# Altium PCB Dynamics v1.0.0.PcbDoc
Units mm, origin at the board's own origin, x right, y up, seen from the top; angles counter-clockwise.
Board outline 54.36 x 81.66 mm, 2 copper layers (Top Layer, Bottom Layer), stack 1.671 mm thick; 60 components, 46 nets, 239 pads, 558 vias.
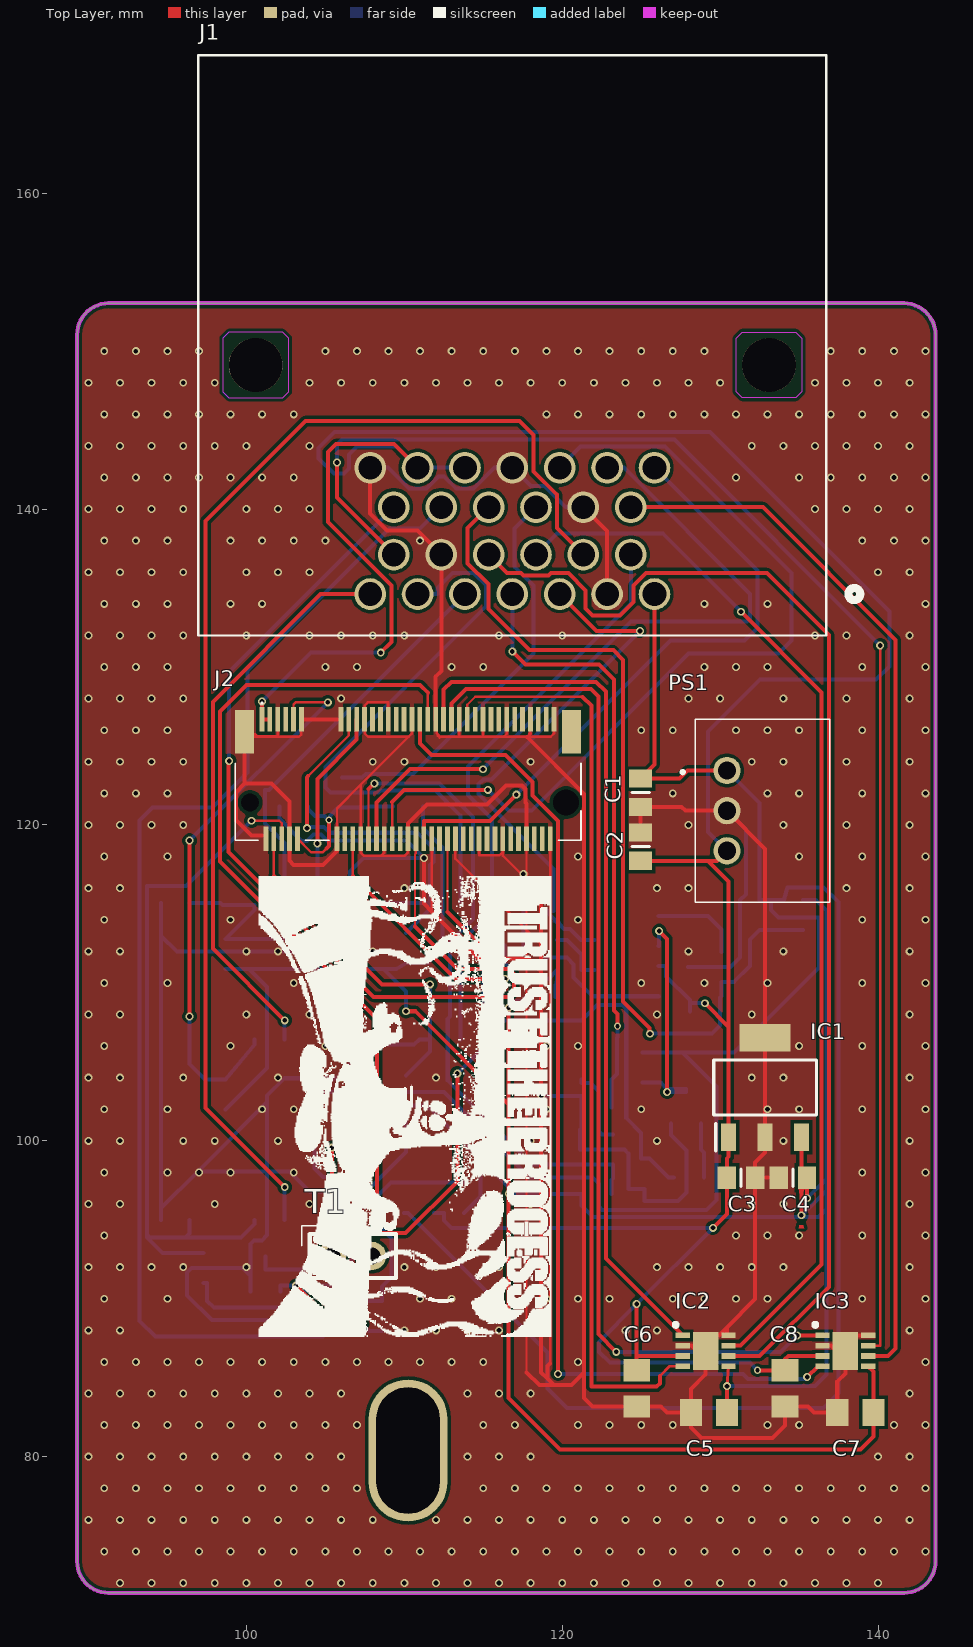
[diagram p0: Top Layer view]
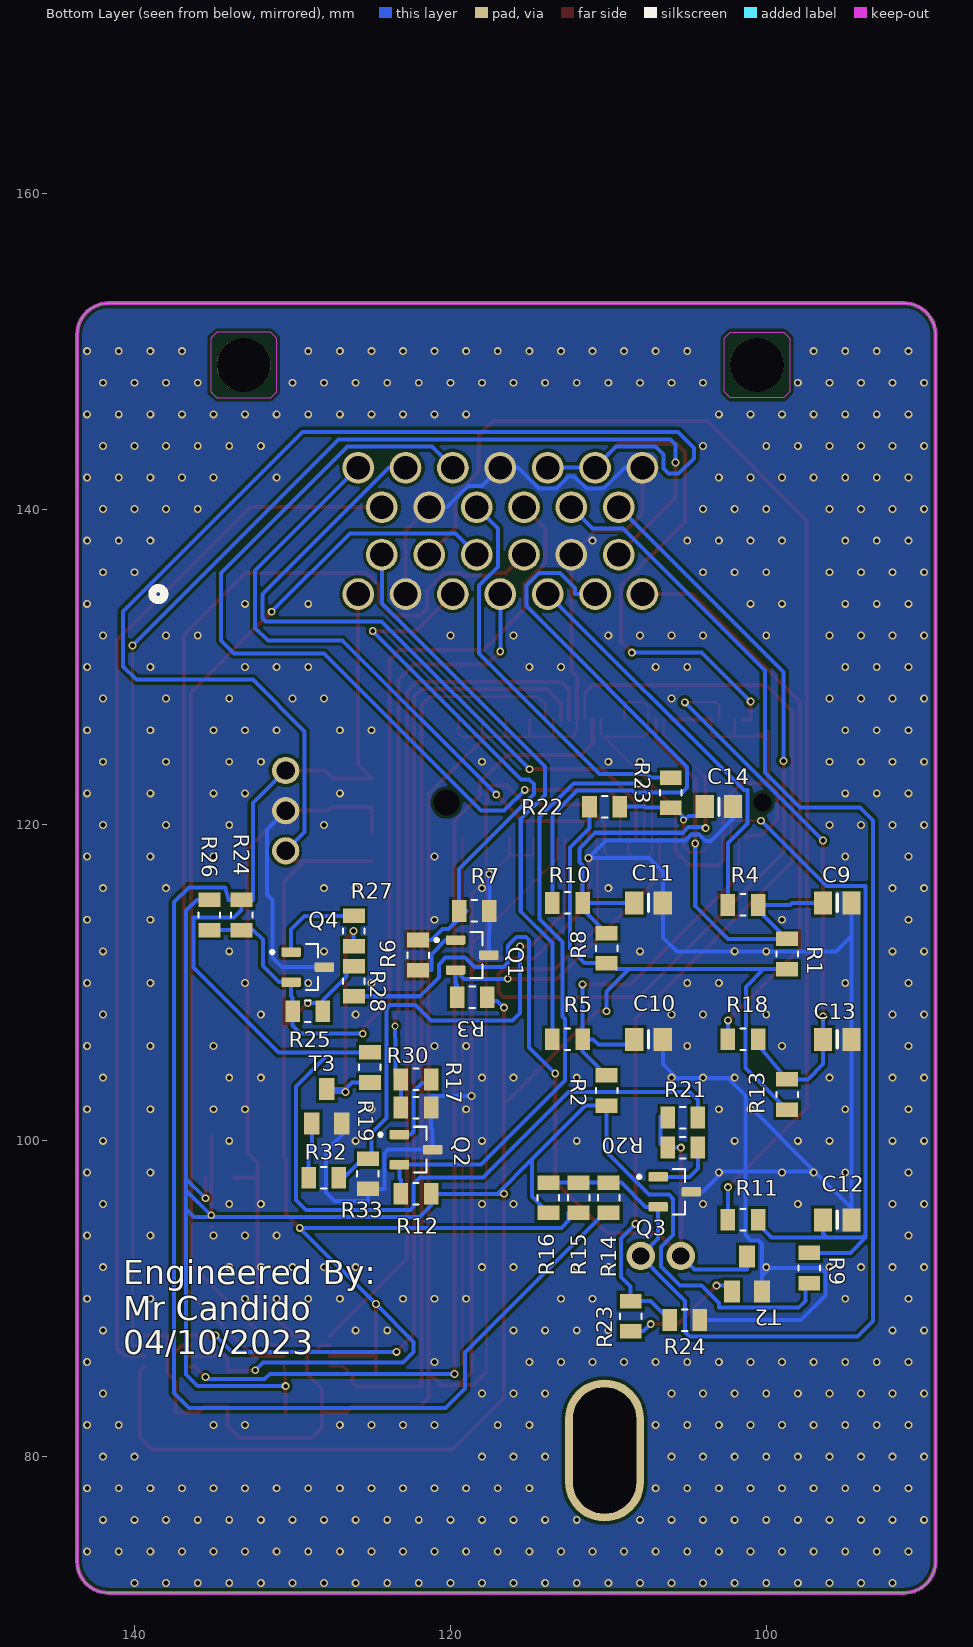
[diagram p1: Bottom Layer view, seen from below]
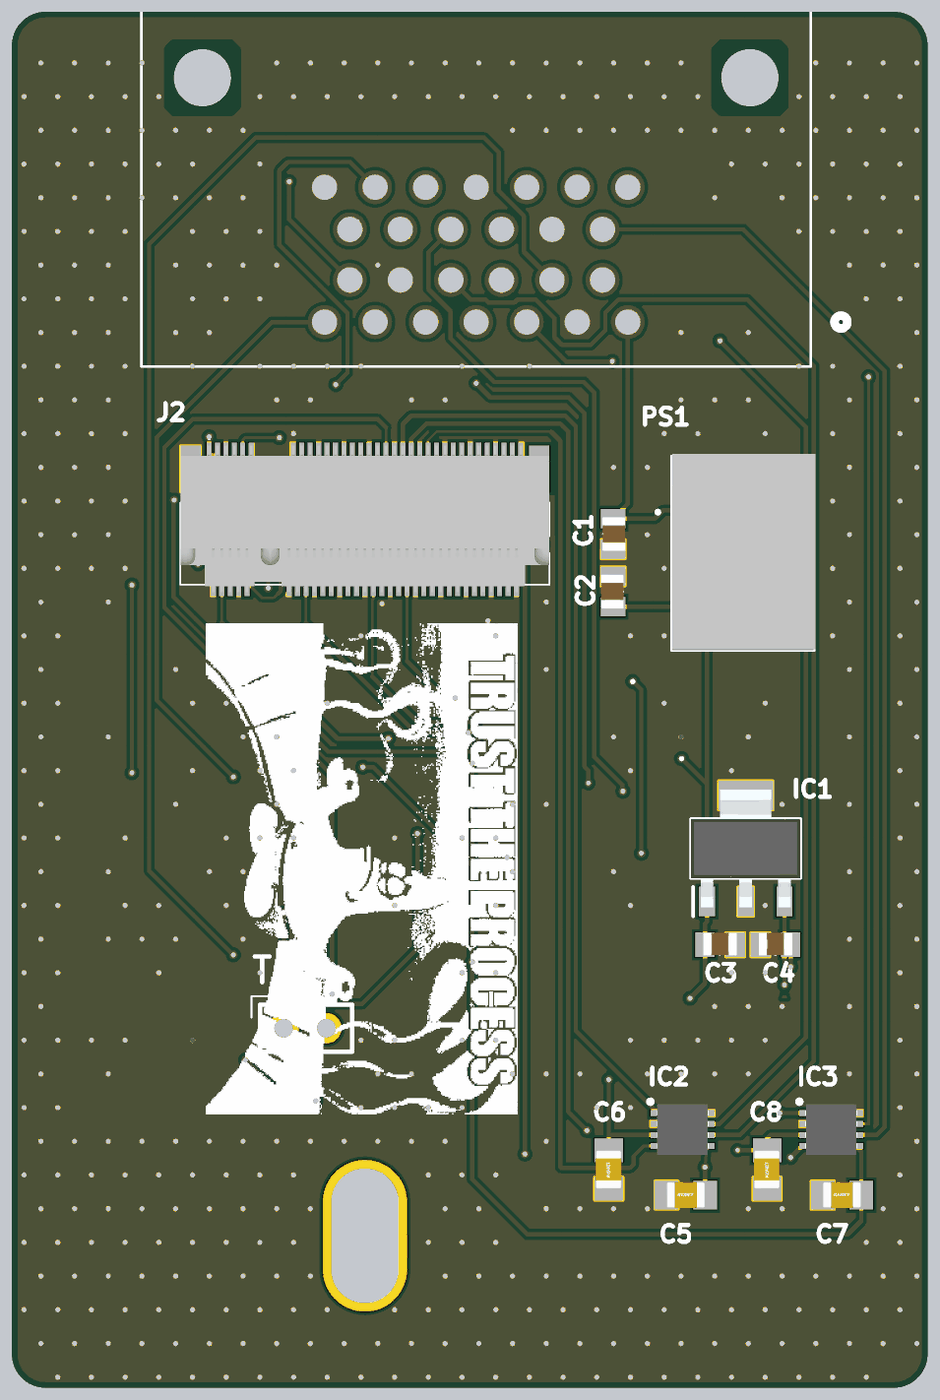
[diagram p2: 3D render of the assembled board from above, using the file's embedded part models]
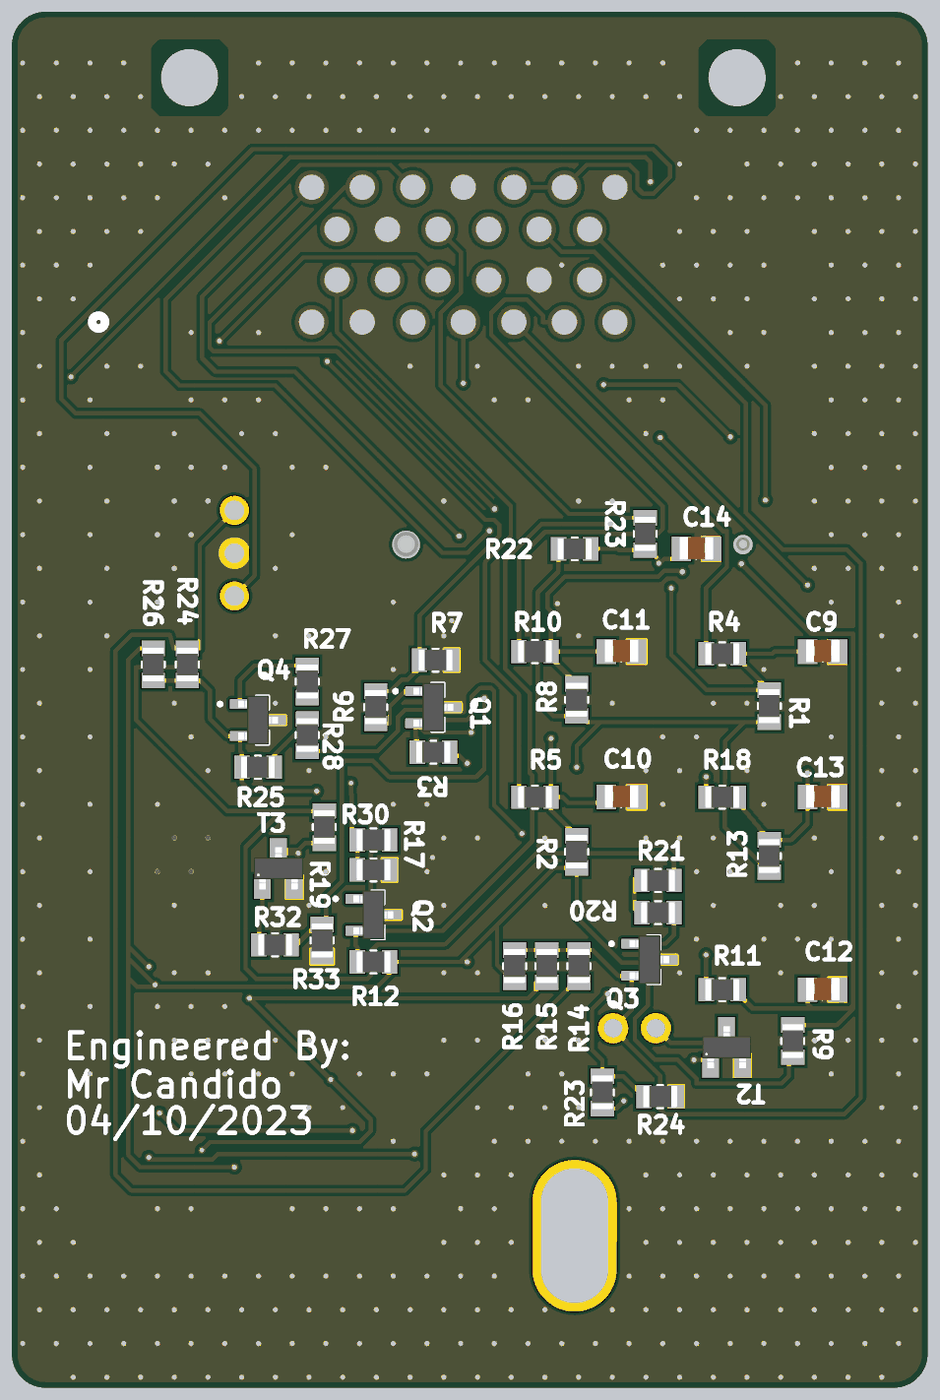
[diagram p3: 3D render of the assembled board from below, using the file's embedded part models]

## Layer stack, top to bottom
Top Solder: solder mask 0.0102, Solder Resist, Dk 3.5
Top Layer: signal copper 0.0356
Dielectric 1: dielectric 1.6, FR-4, Dk 4.8
Bottom Layer: signal copper 0.0356
Bottom Solder: solder mask 0.0102, Solder Resist, Dk 3.5

## Board outline
89.281,73.374 89.281,151.035 cw(c91.281,151.035) 91.281,153.035 141.637,153.035 cw(c141.637,151.035) 143.637,151.035 143.637,73.374 cw(c141.637,73.374) 141.637,71.374 91.281,71.374 cw(c91.281,73.374)

## Design rules (kind name [scope] priority, off if disabled: settings)
BoardOutlineClearance [All] p1: gap=0.2 ignorepadtopadclearanceinfootprint=FALSE
Clearance [All] p1: gap=0.2 ignorepadtopadclearanceinfootprint=TRUE
ComponentClearance [All] p1: gap=0.127 collisioncheckmode=3 verticalgap=0.127 showdistances=TRUE
DiffPairsRouting [All] p1: maxlimit=0.381 minlimit=0.203 mostfreqgap=0.203 toplayer_minwidth=0.203 toplayer_maxwidth=25.4 toplayer_prefwidth=0.203 bottomlayer_minwidth=0.203 bottomlayer_maxwidth=25.4 bottomlayer_prefwidth=0.203 maxuncoupledlength=12.7
Height [All] p1: minheight=0 maxheight=1816.048 prefheight=12.7
HoleSize [All] p1: absolutevalues=TRUE maxlimit=6.3 minlimit=0.3 maxpercent=80.000 minpercent=20.000
HoleToHoleClearance [All] p1: gap=0.25 allowstackedmicrovias=FALSE
MinimumAnnularRing [All] p1: minimumring=0.076
MinimumSolderMaskSliver [All] p1: minsoldermaskwidth=0
PlaneClearance [All] p1: clearance=0.254
PlaneConnect PlaneConnectPowerPads [InPadClass('PowerPads')] p1: planeconnectstyle=Direct reliefexpansion=0.508 reliefentries=4 reliefconductorwidth=0.254 reliefairgap=0.254
PlaneConnect [All] p2: planeconnectstyle=Direct reliefexpansion=0.3 reliefentries=4 reliefconductorwidth=0.203 reliefairgap=0
PolygonConnect PolygonConnectPowerPads [All vs (InPadClass('PowerPads'))] p1: connectstyle=Direct reliefconductorwidth=0.254 reliefentries=4 polygonreliefangle="90 Angle" airgapwidth=0.254
PolygonConnect [All] p2: connectstyle=Direct reliefconductorwidth=0.203 reliefentries=4 polygonreliefangle="90 Angle" airgapwidth=0.203
RoutingVias [All] p1: holewidth=0.3 width=0.5 viastyle="Through Hole" minholewidth=0.3 minwidth=0.5 maxholewidth=0.6 maxwidth=6.6
SMDNeckDown [All] p1: percent=50.000
SilkToSilkClearance [All] p1: silktosilkclearance=0
SilkToSolderMaskClearance [IsPad] p1: minsilkscreentomaskgap=0.127 clearancetoexposedcopper=TRUE
SolderMaskExpansion [All] p1: expansion=0.075 istentingtop=FALSE
UnRoutedNet [All] p1: checkbadconnections=TRUE
Width [All] p1: maxlimit=1 minlimit=0.2 preferedwidth=0.254
19 further rules are at their usual default settings.

## Classes and differential pairs
component class Dynamics_Sch: C1 C2 C3 C4 IC1 J1 J2 PS1
component class Communication: C5 C6 C7 C8 IC2 IC3
component class Analog_Circuit: C9 C10 C11 C12 C13 Q1 Q2 Q3 R1 R2 R3 R4 R5 R6 R7 R8 R9 R10 R11 R12 R13 R14 R15 R16 R17 R18 R19 R20 R21 R23 R24 R28 T1 T2
component class Analog_Circuit_1: C14 Q4 R22 R23 R24 R25 R26 R27 R30 R32 R33 T3

## Components (designator, comment, footprint, x,y, rotation, side; value= is the part's Value field where it differs from the comment)
C1 "0805_Capacitor" 0805_Capacitor 124.968,122.047 r270 top
C2 "0805_Capacitor" 0805_Capacitor 124.968,118.629 r90 top
C3 "0805_Capacitor" 0805_Capacitor 131.318,97.663 r0 top
C4 "0805_Capacitor" 0805_Capacitor 134.609,97.663 r0 top
C5 "0.1u" CAP_0805 129.286,82.804 r0 top
C6 "0.1u" CAP_0805 124.714,84.328 r90 top
C7 "0.1u" CAP_0805 138.557,82.804 r0 top
C8 "0.1u" CAP_0805 134.112,84.328 r90 top
C9 "0805_Capacitor" 0805_Capacitor 95.504,115.062 r180 bottom
C10 "0805_Capacitor" 0805_Capacitor 107.453,106.426 r180 bottom
C11 "0805_Capacitor" 0805_Capacitor 107.453,115.062 r180 bottom
C12 "0805_Capacitor" 0805_Capacitor 95.504,94.996 r180 bottom
C13 "0805_Capacitor" 0805_Capacitor 95.504,106.426 r180 bottom
C14 "0805_Capacitor" 0805_Capacitor 102.997,121.158 r180 bottom
IC1 "MIC5239-3.3YS-TR" SOT230P700X180-4N 132.842,103.378 r90 top
IC2 "MCP2542FD-E_MF" SON65P300X300X100-9N-D 129.085,86.7 r0 top
IC3 "MCP2542FD-E_MF" SON65P300X300X100-9N-D 137.922,86.7 r0 top
J1 "6473423-1" CONN26_6473423-1_TEC 125.84,134.621 r180 top locked
J2 "2199230-3" 21992303 110.236,121.412 r0 top locked
PS1 "R-78E5.0-0.5" R78E5005 130.429,123.444 r270 top
Q1 "LND150K1-G" SOT93-NMOS 118.618,111.76 r180 bottom
Q2 "LND150K1-G" SOT93-NMOS 122.174,99.441 r180 bottom
Q3 "LND150K1-G" SOT93-NMOS 105.791,96.774 r180 bottom
Q4 "LND150K1-G" SOT93-NMOS 129.032,110.998 r180 bottom
R1 "0805_Resistor" 0805_Resistor 98.679,111.826 r270 bottom
R2 "0805_Resistor" 0805_Resistor 110.109,103.185 r270 bottom
R3 "0805_Resistor" 0805_Resistor 118.618,109.093 r0 bottom
R4 "0805_Resistor" 0805_Resistor 101.473,114.935 r180 bottom
R5 "0805_Resistor" 0805_Resistor 112.588,106.426 r180 bottom
R6 "0805_Resistor" 0805_Resistor 122.047,111.76 r90 bottom
R7 "0805_Resistor" 0805_Resistor 118.491,114.554 r180 bottom
R8 "0805_Resistor" 0805_Resistor 110.109,112.202 r270 bottom
R9 "0805_Resistor" 0805_Resistor 97.282,91.948 r270 bottom
R10 "0805_Resistor" 0805_Resistor 112.588,115.062 r180 bottom
R11 "0805_Resistor" 0805_Resistor 101.473,94.996 r180 bottom
R12 "0805_Resistor" 0805_Resistor 122.174,96.647 r0 bottom
R13 "0805_Resistor" 0805_Resistor 98.679,102.931 r270 bottom
R14 "0805_Resistor" 0805_Resistor 109.982,96.393 r90 bottom
R15 "0805_Resistor" 0805_Resistor 111.887,96.393 r90 bottom
R16 "0805_Resistor" 0805_Resistor 113.792,96.393 r90 bottom
R17 "0805_Resistor" 0805_Resistor 122.174,103.886 r0 bottom
R18 "0805_Resistor" 0805_Resistor 101.473,106.426 r180 bottom
R19 "0805_Resistor" 0805_Resistor 122.174,102.108 r180 bottom
R20 "0805_Resistor" 0805_Resistor 105.283,99.568 r0 bottom
R21 "0805_Resistor" 0805_Resistor 105.283,101.473 r180 bottom
R22 "0805_Resistor" 0805_Resistor 110.236,121.158 r0 bottom
R23 "0805_Resistor" 0805_Resistor 108.585,88.9 r90 bottom
R23 "0805_Resistor" 0805_Resistor 106.045,122.047 r270 bottom
R24 "0805_Resistor" 0805_Resistor 105.156,88.646 r0 bottom
R24 "0805_Resistor" 0805_Resistor 133.223,114.3 r270 bottom
R25 "0805_Resistor" 0805_Resistor 129.032,108.204 r0 bottom
R26 "0805_Resistor" 0805_Resistor 135.255,114.3 r270 bottom
R27 "0805_Resistor" 0805_Resistor 126.111,113.284 r270 bottom
R28 "0805_Resistor" 0805_Resistor 126.111,110.109 r270 bottom
R30 "0805_Resistor" 0805_Resistor 125.095,104.648 r90 bottom
R32 "0805_Resistor" 0805_Resistor 128.016,97.663 r180 bottom
R33 "0805_Resistor" 0805_Resistor 125.222,97.917 r90 bottom
T1 "Pin_header_2" Pin_header_2 105.41,92.71 r90 top
T2 "BC847" SOT23 101.219,91.567 r180 bottom
T3 "BC847" SOT23 127.823,102.192 r180 bottom

## Footprints (in the part's own frame and the unit in brackets; to place one, negate y for a bottom-side part, rotate by r counter-clockwise, add the part's x,y. Pads: shape width x height; smd on the part's side, far side on the other; paste and mask are expansions set on the pad)
0805_Capacitor [mm]
  rect 1.15x1.45 smd: 1(-0.9,0) 2(0.9,0)
  silkscreen extent 0,-0.55 0,0.55, body extent -1,-0.64 1,0.71, height 1.23
0805_Resistor [mm]
  rect 0.92x1.38 smd: 1(-0.955,0) 2(0.955,0)
  silkscreen extent -0.17,-0.68 0.17,0.68, body extent -1,-0.63 1,0.63, height 0.6
21992303 [mm]
  rect 0.3x1.55 smd: 1(-9.25,5.275) 2(-9,-2.275) 3(-8.75,5.275) 4(-8.5,-2.275) 5(-8.25,5.275) 6(-8,-2.275) 7(-7.75,5.275) 8(-7.5,-2.275) 9(-7.25,5.275) 10(-7,-2.275) 11(-6.75,5.275) 20(-4.5,-2.275) 21(-4.25,5.275) 22(-4,-2.275) 23(-3.75,5.275) 24(-3.5,-2.275) 25(-3.25,5.275) 26(-3,-2.275) 27(-2.75,5.275) 28(-2.5,-2.275) 29(-2.25,5.275) 30(-2,-2.275) 31(-1.75,5.275) 32(-1.5,-2.275) 33(-1.25,5.275) 34(-1,-2.275) 35(-0.75,5.275) 36(-0.5,-2.275) 37(-0.25,5.275) 38(0,-2.275) 39(0.25,5.275) 40(0.5,-2.275) 41(0.75,5.275) 42(1,-2.275) 43(1.25,5.275) 44(1.5,-2.275) 45(1.75,5.275) 46(2,-2.275) 47(2.25,5.275) 48(2.5,-2.275) 49(2.75,5.275) 50(3,-2.275) 51(3.25,5.275) 52(3.5,-2.275) 53(3.75,5.275) 54(4,-2.275) 55(4.25,5.275) 56(4.5,-2.275) 57(4.75,5.275) 58(5,-2.275) 59(5.25,5.275) 60(5.5,-2.275) 61(5.75,5.275) 62(6,-2.275) 63(6.25,5.275) 64(6.5,-2.275) 65(6.75,5.275) 66(7,-2.275) 67(7.25,5.275) 68(7.5,-2.275) 69(7.75,5.275) 70(8,-2.275) 71(8.25,5.275) 72(8.5,-2.275) 73(8.75,5.275) 74(9,-2.275) 75(9.25,5.275)
  round 0.575 hole 1.15 unplated: MH1(-10,0)
  round 0.825 hole 1.65 unplated: MH2(10,0)
  rect 1.2x2.75 smd: MP1(-10.35,4.5) MP2(10.35,4.5)
  oval 5x9 hole 4 slot 8 at 90 deg: MP3(0,-41.021)
  silkscreen extent -10.95,-2.38 10.95,6.35, body extent -10.95,-2.82 10.95,5.88, height 4.08
CAP_0805 [mm]
  rect 1.4x1.7 smd: 1(-1.143,0) 2(1.143,0)
  body extent -1.15,-0.76 1.15,0.79, height 1.01
CONN26_6473423-1_TEC [mil]
  round 79 / inner round 60 / far side round 79 hole 59 paste-39.5 mask-39.5: 1(0,0) 2(118.11,0) 3(236.22,0) 4(354.33,0) 5(472.44,0) 6(590.55,0) 7(708.66,0) 8(59.05,-98.42) 9(177.16,-98.42) 10(295.27,-98.42) 11(413.39,-98.42) 12(531.5,-98.42) 13(649.61,-98.42) 14(59.05,-216.53) 15(177.16,-216.53) 16(295.27,-216.53) 17(413.39,-216.53) 18(531.5,-216.53) 19(649.61,-216.53) 20(0,-314.96) 21(118.11,-314.96) 22(236.22,-314.96) 23(354.33,-314.96) 24(472.44,-314.96) 25(590.55,-314.96) 26(708.66,-314.96)
  round 134 / inner round 60 / far side round 134 hole 134 unplated paste-67 mask-67: 27(-285.43,-570.87) 28(994.09,-570.87)
  Keep-Out Layer region: 1061.09,-652.87 1076.09,-637.87 1076.09,-503.87 1061.09,-488.87 927.09,-488.87 912.09,-503.87 912.09,-637.87 927.09,-652.87
  Keep-Out Layer region: -352.43,-652.87 -367.43,-637.87 -367.43,-503.87 -352.43,-488.87 -218.43,-488.87 -203.43,-503.87 -203.43,-637.87 -218.43,-652.87
  silkscreen extent -513,-1344 1137,103
Pin_header_2 [mm]
  round 1.8 hole 1.1 mask+0.07: 1(0,0) 2(0,-2.54)
  silkscreen extent -1.4,-4.06 1.91,1.91
R78E5005 [mm]
  round 1.725 hole 1.15: 1(0,0) 2(2.54,0) 3(5.08,0)
  silkscreen extent -3.26,-2.9 8.34,6.5, body extent -3.34,-1.97 8.25,6.54, height 10.86
SON65P300X300X100-9N-D [mm]
  rect 0.9x0.35 smd: 1(-1.45,0.975) 2(-1.45,0.325) 3(-1.45,-0.325) 4(-1.45,-0.975) 5(1.45,-0.975) 6(1.45,-0.325) 7(1.45,0.325) 8(1.45,0.975)
  rect 1.6x2.4 smd: 9(0,0)
  silkscreen extent -2.02,1.53 -1.77,1.77, body extent -1.55,-1.5 1.55,1.5, height 1
SOT23 [mm]
  rect 1x1.4 smd: 1(-0.95,-1.1) 2(0.95,-1.1) 3(0,1.1)
  body extent -1.44,-1.24 1.46,1.26, height 1.1
SOT93-NMOS [mm]
  rrect25% 1.24x0.59 smd: 1(-1.055,0.95) 2(-1.055,-0.95) 3(1.055,0)
  silkscreen extent -2.35,-1.45 0.65,1.45, body extent -1.18,-1.45 1.18,1.45, height 1.12
SOT230P700X180-4N [mm]
  rect 1.75x0.95 smd: 1(-3.15,2.3) 2(-3.15,0) 3(-3.15,-2.3)
  rect 1.75x3.25 smd: 4(3.15,0)
  silkscreen extent -4.02,-3.25 1.75,3.25, body extent -3.5,-3.25 3.5,3.25, height 1.8

## Part data
C1 C2 C3 C4 C9 C10 C11 C12 C13 C14: Package="0805 Samsung", Availability=Unavailable, MF=Samsung, MP=CL21B104KBCNNNC, Price=None, SnapEDA_Link=https://www.snapeda.com/parts/CL21B104KBCNNNC/Samsung/view-part/3597943/?ref=snap
C5 C6 C7 C8: library part CAP_0805_10V, "Capacitor SMD 0805 10V"
IC1: "Integrated Circuit", Manufacturer_Name=Microchip, Mouser Part Number=998-MIC5239-3.3YSTR, Arrow Part Number=MIC5239-3.3YS-TR, Arrow Price/Stock=https://www.arrow.com/en/products/mic5239-3.3ys-tr/microchip-technology?region=nac, Datasheet Link=https://ww1.microchip.com/downloads/en/DeviceDoc/mic5239.pdf, Height=1.8mm, Manufacturer_Part_Number=MIC5239-3.3YS-TR, Mouser Price/Stock=https://www.mouser.co.uk/ProductDetail/Microchip-Technology-Micrel/MIC5239-33YS-TR?qs=U6T8BxXiZAXN0UitWWB92A%3D%3D
IC2 IC3: "Integrated Circuit", Arrow Part Number=MCP2542FD-E/MF, Manufacturer_Name=Microchip, Mouser Part Number=579-MCP2542FD-E/MF, Arrow Price/Stock=https://www.arrow.com/en/products/mcp2542fd-emf/microchip-technology?region=nac, Datasheet Link=http://ww1.microchip.com/downloads/en/devicedoc/20005514a.pdf, Height=1mm, Manufacturer_Part_Number=MCP2542FD-E/MF, Mouser Price/Stock=https://www.mouser.co.uk/ProductDetail/Microchip-Technology-Atmel/MCP2542FD-E-MF?qs=l7cgNqFNU1jog4BwTzULBw%3D%3D
J1: "Connector", Manufacturer_Name="TE Connectivity", Mouser Part Number=571-6473423-1, Datasheet Link=https://www.te.com/commerce/DocumentDelivery/DDEController?Action=showdoc&DocId=Customer+Drawing%7F9-1437287-8%7FA1%7Fpdf%7FEnglish%7FENG_CD_9-1437287-8_A1.pdf%7F6473423-1, Height=27.9mm, Manufacturer_Part_Number=6473423-1, Mouser Price/Stock=https://www.mouser.co.uk/ProductDetail/TE-Connectivity/6473423-1?qs=XhI5AayaxxW9FyxB9N39mQ%3D%3D
J2: "Connector", Manufacturer_Name="TE Connectivity", Mouser Part Number=571-2199230-3, Arrow Part Number=2199230-3, Arrow Price/Stock=https://www.arrow.com/en/products/2199230-3/te-connectivity?region=nac, Datasheet Link=https://componentsearchengine.com/Datasheets/2/2199230-3.pdf, Height=4.2mm, Manufacturer_Part_Number=2199230-3, Mouser Price/Stock=https://www.mouser.co.uk/ProductDetail/TE-Connectivity/2199230-3?qs=EQCnRgr4b6HElQOKr5ma1Q%3D%3D
PS1: "Power Supply", Manufacturer_Name="RECOM Power", Mouser Part Number=919-R-78E5.0-0.5, Arrow Part Number=R-78E5.0-0.5, Arrow Price/Stock=https://www.arrow.com/en/products/r-78e5.0-0.5/recom-power?region=europe, Datasheet Link=https://datasheet.datasheetarchive.com/originals/distributors/Datasheets_SAMA/1560217c2d38d5ce10907af13420fc49.pdf, Height=10.9mm, Manufacturer_Part_Number=R-78E5.0-0.5, Mouser Price/Stock=https://www.mouser.co.uk/ProductDetail/RECOM-Power/R-78E5.0-0.5?qs=JeAkOuORR2UvBuiB2kZVZQ%3D%3D
Q1 Q2 Q3 Q4: "MOSFET, DEPLETION-MODE, 500V, 1K Ohm3 SOT-23 T/R", Package="SOT-23 Microchip", Check_prices=https://www.snapeda.com/parts/LND150K1-G/Microchip/view-part/?ref=eda, MF=Microchip, MP=LND150K1-G, SnapEDA_Link=https://www.snapeda.com/parts/LND150K1-G/Microchip/view-part/?ref=snap
R1 R2 R3 R4 R5 R6 R7 R8 R9 R10 R11 R12 R13 R14 R15 R16 R17 R18 R19 R20 R21 R22 R23 R23 R24 R24 R25 R26 R27 R28 R30 R32 R33: Package="2012 Rohm Semiconductor", Availability="In Stock", MF=Yageo, MP=RC0805FR-07910RL, Price=None, Purchase-URL=https://pricing.snapeda.com/search/part/RC0805FR-07910RL/?ref=eda
T2 T3: "<b>NPN TRANSISTOR</b>", Package=None, Availability=Unavailable, MP=BC847, Price=None

## Via types
v1: diameter 0.5, hole 0.3, Top Layer to Bottom Layer, tented both sides, 555 vias
v2: diameter 0.45, hole 0.275, Top Layer to Bottom Layer, tented both sides, 3 vias

## Nets (pads, with @x,y where several pads share a name; then routed paths per layer and width w, separated by ;. In a path a pad name is that pad's centre, name@x,y a point inside that pad or via, vN(x,y) a via of type N, cw(c..) or ccw(c..) an arc to the next point about the centre after c; other vN are vias at no path point)
+3V3: C4.2 C5.2 C7.2 IC1.3 IC2.5 IC3.5 R1.2 R2.2 R3.1 R8.2 R9.2 R12.1 R13.2 R16.1 R22.2 R26.1 | length 212.1
  Top Layer w0.175: v1(130.429,84.463) IC2.5
  Top Layer w0.254: v1(110.109,108.204) 110.713,108.204 116.611,102.306 ; v1(116.611,108.433) 116.611,102.306 ; C5.2 v1(130.429,84.463) ; v1(135.142,95.285) IC1.3 ; v1(135.509,96.363) C4.2 ; IC3.5 139.7,85.397 C7.2 139.7,81.28 138.887,80.467 119.863,80.467 116.611,83.718 v1(116.611,96.647) 116.611,102.306
  Bottom Layer w0.254: R9.2 97.511,90.993 97.511,89.865 97.942,89.433 102.997,89.433 102.997,89.738 104.104,90.845 105.45,90.845 106.655,92.05 106.655,93.269 105.893,94.031 105.893,96.317 106.172,96.596 107.417,96.596 110.109,99.289 R2.2 111.444,102.23 114.833,98.84 ; R13.2 101.321,104.618 101.295,109.753 100.178,110.871 ; R1.2 100.178,110.871 ; v1(110.109,108.204) 110.109,109.449 108.687,110.871 ; R22.2 111.191,119.812 112.42,118.582 112.42,112.166 111.501,111.247 R8.2 109.479,110.871 108.687,110.871 ; R16.1 114.833,96.479 114.833,98.84 ; v1(116.611,96.647) 117.027,96.647 ; v1(116.611,108.433) 117.043,108.864 117.663,108.864 R3.1 ; v1(130.429,84.463) 136,84.463 136.726,85.189 136.726,95.68 ; v1(135.142,95.285) 136.726,96.869 ; R26.1 136.053,115.255 136.726,114.582 136.726,97.58 ; v1(135.509,96.363) 136.726,97.58 ; 100.178,110.871 108.687,110.871 ; 114.833,98.84 117.027,96.647 ; 117.027,96.647 117.749,96.647 R12.1 121.219,95.91 121.953,95.176 136.222,95.176 136.726,95.68 ; 136.726,95.68 136.726,96.869 ; 136.726,96.869 136.726,97.58
+5: C2.1 C3.1 C6.2 C8.2 IC1.1 IC2.3 IC3.3 J1.24 J1.25 J2.1 J2.3 PS1.3 R15.1 R25.1 R28.1 | length 198.4
  Top Layer w0.254: v1(100.986,127.813) J2.1 J2.3 ; v1(108.509,130.912) 109.195,131.597 109.195,135.153 105.156,139.192 105.156,143.612 105.664,144.12 109.341,144.12 J1.25 ; C6.2 124.714,86.375 ; v1(124.714,89.662) 124.714,86.375 ; C2.1 129.235,117.729 ; IC2.3 124.714,86.375 ; v1(129.032,108.712) 130.542,107.202 ; v1(129.54,94.488) 130.418,95.366 C3.1 130.418,98.882 130.542,99.006 IC1.1 130.542,107.202 ; PS1.3 129.794,117.729 129.235,117.729 ; v2(132.359,85.471) C8.2 134.112,86.172 134.315,86.375 IC3.3 ; 129.235,117.729 130.542,116.422 130.542,107.202
  Bottom Layer w0.254: v1(100.986,127.813) 104.085,130.912 v1(108.509,130.912) ; R15.1 112.522,95.438 112.522,94.945 112.979,94.488 v1(129.54,94.488) v1(124.714,89.662) 122.326,87.274 122.326,86.639 123.012,85.954 131.877,85.954 v2(132.359,85.471) ; J1.24 J1.25 109.51,143.951 107.002,143.951 106.51,143.459 106.51,142.569 106.18,142.24 105.545,142.24 104.572,143.213 104.572,143.866 105.588,144.882 129.362,144.882 140.716,133.528 140.716,130.048 139.878,129.21 132.512,129.21 129.235,125.933 129.235,119.558 PS1.3 ; R28.1 126.568,111.064 126.568,110.414 128.077,108.905 R25.1@128.077,108.712 ; R25.1 R25.1@128.077,108.712 ; v1(129.032,108.712) R25.1@128.077,108.712
+24: C1.1 J1.1 PS1.1 R14.1 R21.2 R24.1@133.223,115.255 R30.2 | length 159.8
  Top Layer w0.254: J1.1 125.84,123.819 C1.1 127.432,122.947 127.929,123.444 PS1.1
  Bottom Layer w0.254: R21.2 104.328,102.575 104.851,103.099 112.522,103.099 117.932,97.688 121.92,97.688 122.326,97.282 122.326,95.833 122.53,95.63 129.133,95.63 129.769,96.266 129.769,103.454 127.62,105.603 ; R14.1 110.236,95.438 119.075,86.599 119.075,84.303 120.294,83.083 136.55,83.083 137.49,84.023 137.49,115.113 136.55,116.053 134.264,116.053 134.036,115.255 R24.1@133.223,115.255 ; R30.2 127.62,105.603 ; PS1.1 132.486,121.387 132.486,115.255 R24.1@133.223,115.255 ; 127.62,105.603 130.886,105.603 136.272,110.989 136.272,114.132 133.696,114.132 133.223,114.605 R24.1@133.223,115.255
GND: C1.2 C2.2 C3.2 C4.1 C5.1 C6.1 C7.1 C8.1 C9.2 C10.2 C11.2 C12.2 C13.2 C14.2 IC1.2 IC1.4 IC2.2 IC2.8 IC2.9 IC3.2 IC3.8 IC3.9 J1.2 J1.12 J1.15 J1.23 J1.26 J2.2 J2.5 J2.8 J2.11 J2.20 J2.21 J2.26 J2.27 J2.32 J2.33 J2.38 J2.39 J2.44 J2.45 J2.50 J2.51 J2.56 J2.57 J2.62 J2.63 J2.68 J2.69 J2.74 J2.75 J2.MP1 PS1.2 Q1.3 Q2.3 Q3.3 Q4.3 R7.2 R19.2 R24.1@104.201,88.646 R33.1 T2.2 T3.2 | length 531.2
  Top Layer w0.15: J2.MP1@99.886,125.755 100.043,125.755 100.559,125.755 100.686,125.628 101.986,125.628 J2.5 ; J2.MP1@100.213,125.585 103.335,125.585 103.486,125.736 J2.11 ; J2.20 105.736,121.05 107.236,122.55 ; J2.32 108.736,118.25 108.521,118.035 ; J2.33 108.986,127.762 107.696,127.762 107.486,127.552 J2.27 107.486,125.838 107.509,125.815 107.509,125.777 107.701,125.585 110.271,125.585 ; J2.38 110.236,118.25 110.021,118.035 108.521,118.035 ; J2.39 110.486,125.8 110.271,125.585 ; 111.736,114.534 J2.44 ; J2.45@112.009,126.039 J2.45 112.061,125.987 112.061,125.798 112.162,125.697 112.274,125.585 112.308,125.585 113.486,125.585 ; 112.125,125.66 112.224,125.561 112.224,125.521 ; J2.50 113.236,117.856 117.736,113.356 ; J2.51 113.486,125.585 ; J2.56 114.736,118.085 116.027,118.085 116.236,118.293 ; J2.57 114.986,125.585 ; J2.62 116.236,118.293 ; J2.63 116.486,125.781 116.29,125.585 ; 117.736,85.344 117.736,111.557 117.736,113.356 ; J2.68 117.736,116.894 117.736,116.559 ; 117.963,125.8 117.986,125.8 ; J2.69 117.986,125.8 ; 118.669,112.423 117.736,113.356 ; 118.669,115.626 117.736,116.559 ; 119.236,85.911 J2.74 ; J2.75 119.486,125.793 119.278,125.585 117.771,125.585 ; 107.236,122.55 110.271,125.585 ; 107.236,122.55 J2.26 107.236,118.25 107.451,118.035 108.521,118.035 ; 113.486,125.585 114.986,125.585 ; 114.986,125.585 116.29,125.585 ; 116.236,118.293 116.236,118.059 117.736,116.559 ; 116.29,125.585 117.771,125.585 ; 117.736,113.356 117.736,116.559 ; 117.771,125.585 117.963,125.777 117.986,125.8
  Top Layer w0.254: J2.MP1@100.213,125.585 100.043,125.755 J2.MP1 99.886,125.755 99.886,122.619 ; J2.2 101.236,119.329 100.325,119.329 99.334,120.32 99.334,122.067 99.886,122.619 ; J2.11 J2.21 ; J2.20 105.736,118.36 104.851,117.475 102.997,117.475 102.736,117.736 J2.8 102.736,121.483 101.6,122.619 99.886,122.619 ; J1.26 107.84,139.708 108.915,138.633 110.828,138.633 J1.12 112.34,129.739 111.986,129.385 J2.45 ; J2.38 110.236,120.091 111.43,121.285 115.222,121.285 116.434,122.497 117.45,122.497 117.671,122.276 117.671,121.408 117.736,121.343 J2.68 ; v1(111.252,117.907) 111.252,115.018 111.736,114.534 114.713,111.557 117.736,111.557 117.856,111.557 118.669,110.744 ; v1(117.536,116.894) v1@117.736,116.894 ; 117.736,85.344 118.549,84.531 119.482,84.531 ; 117.771,125.585 121.388,121.968 121.388,85.344 ; 117.963,125.777 117.963,125.8 ; 118.669,115.626 118.669,112.423 118.669,110.744 ; 119.236,85.911 119.075,85.75 119.075,84.938 ; J1.15 122.84,138.621 J1.2 ; C2.2 C1.2 127.559,121.147 127.802,120.904 PS1.2 132.842,118.491 IC1.4 IC1.2 132.842,99.252 132.218,98.628 C3.2 ; IC2.2 128.194,87.025 128.519,86.7 IC2.9 ; IC2.8 130.435,87.675 130.435,88.189 ; C4.1 C3.2 ; IC3.2 137.033,87.025 137.358,86.7 IC3.9 ; IC3.8 137.922,87.675 IC3.9 ; 118.669,110.744 v1(118.669,102.845) 118.669,85.344 119.075,84.938 ; 119.075,84.938 119.482,84.531 ; 119.482,84.531 120.575,84.531 121.388,85.344 ; 121.388,85.344 121.388,83.717 121.92,83.185 C6.1 126.238,83.185 126.619,82.804 C5.1 ; C5.1 128.143,84.277 129.085,85.219 IC2.9 ; C5.1 128.143,81.839 128.809,81.173 133.299,81.173 134.112,81.986 C8.1 135.56,83.185 135.941,82.804 C7.1 137.414,84.76 137.922,85.268 IC3.9 ; IC2.9 129.085,87.675 129.921,87.675 130.435,88.189 ; 130.435,88.189 132.218,89.972 C3.2
  Bottom Layer w0.254: C12.2 94.604,95.736 ; C9.2 94.604,112.979 ; T2.2 100.269,91.44 ; C14.2 102.097,120.407 103.505,118.999 103.852,118.999 104.257,119.403 104.735,119.403 105.114,119.024 110.134,119.024 v1(111.252,117.907) 107.417,117.907 106.553,117.043 C11.2 106.553,112.878 105.664,111.989 95.595,111.989 94.604,112.979 ; R24.1@104.201,88.646 97.815,88.646 96.241,90.221 96.241,91.669 96.52,91.948 99.761,91.948 100.269,91.44 ; Q3.3 104.038,96.774 102.743,98.069 101.321,98.069 ; C10.2 106.553,104.851 105.664,103.962 102.413,103.962 101.321,102.87 101.321,102.453 ; J1.26 108.959,142.621 110.289,141.291 111.391,141.291 112.163,142.062 112.517,142.062 113.289,141.291 114.391,141.291 115.721,142.621 J1.23 118.008,141.453 118.89,141.453 120.221,140.121 J1.15 ; v1(117.536,116.894) R7.2 117.536,113.159 117.563,113.132 Q1.3 ; v1(118.669,102.845) 121.219,102.845 R19.2 121.219,100.811 121.119,100.711 Q2.3 123.952,99.441 124.181,99.212 124.181,96.962 R33.1 125.222,96.19 127.33,96.19 127.864,96.723 127.864,99.39 126.873,100.381 T3.2 ; Q4.3 130.658,110.998 131.267,111.608 131.267,115.24 131.623,115.595 131.623,119.71 PS1.2 ; 94.604,95.736 v1@96.937,98.069 ; 94.604,95.736 C13.2 94.604,112.979 ; v1@96.937,98.069 101.321,102.453 ; v1@96.937,98.069 101.321,98.069 ; 100.269,91.44 100.269,93.472 100.498,93.701 100.99,93.701 101.321,94.031 101.321,98.069 ; 101.321,98.069 101.321,102.453
  other v1: 92,72 94,72 96,72 98,72 100,72 102,72 104,72 106,72 108,72 110,72 112,72 114,72 116,72 118,72 120,72 122,72 124,72 126,72 128,72 130,72 132,72 134,72 136,72 138,72 140,72 91,74 93,74 95,74 97,74 99,74 101,74 103,74 105,74 107,74 109,74 111,74 113,74 115,74 117,74 119,74 121,74 123,74 125,74 127,74 129,74 131,74 133,74 135,74 137,74 139,74 141,74 143,74 90,76 92,76 94,76 96,76 98,76 100,76 102,76 104,76 106,76 108,76 112,76 114,76 116,76 118,76 120,76 122,76 124,76 126,76 128,76 130,76 132,76 134,76 136,76 138,76 140,76 142,76 91,78 93,78 95,78 97,78 99,78 101,78 103,78 105,78 107,78 115,78 117,78 119,78 121,78 123,78 125,78 127,78 129,78 131,78 133,78 135,78 137,78 139,78 141,78 143,78 90,80 92,80 94,80 96,80 98,80 100,80 102,80 104,80 106,80 114,80 116,80 118,80 140,80 142,80 91,82 93,82 95,82 97,82 99,82 101,82 103,82 105,82 107,82 115,82 117,82 121,82 123,82 125,82 127,82 133,82 135,82 141,82 143,82 90,84 92,84 94,84 96,84 98,84 100,84 102,84 104,84 106,84 114,84 116,84 118,84 142,84 91,86 93,86 95,86 97,86 99,86 101,86 103,86 105,86 107,86 109,86 111,86 113,86 115,86 121,86 143,86 90,88 92,88 110,88 112,88 114,88 116,88 124,88 126,88 142,88 91,90 95,90 111,90 113,90 119,90 121,90 123,90 127,90 129,90 131,90 133,90 139,90 143,90 90,92 92,92 94,92 96,92 100,92 110,92 112,92 116,92 118,92 126,92 128,92 130,92 132,92 134,92 142,92 91,94 131,94 133,94 135,94 139,94 143,94 90,96 92,96 98,96 104,96 116,96 118,96 132,96 134,96 142,96 91,98 95,98 97,98 99,98 103,98 139,98 143,98 90,100 92,100 96,100 98,100 102,100 112,100 118,100 126,100 134,100 142,100 91,102 95,102 101,102 103,102 119,102 125,102 133,102 135,102 139,102 143,102 90,104 92,104 96,104 102,104 104,104 106,104 112,104 116,104 118,104 132,104 134,104 142,104 91,106 99,106 105,106 119,106 121,106 135,106 139,106 143,106 90,108 92,108 100,108 104,108 106,108 126,108 132,108 142,108 91,110 95,110 103,110 105,110 125,110 129,110 133,110 139,110 143,110 90,112 92,112 100,112 102,112 108,112 128,112 134,112 142,112 91,114 99,114 121,114 139,114 143,114 90,116 92,116 110,116 118,116 126,116 128,116 138,116 142,116 91,118 95,118 121,118 135,118 139,118 143,118 90,120 92,120 94,120 96,120 128,120 134,120 138,120 142,120 91,122 93,122 95,122 127,122 133,122 135,122 139,122 143,122 90,124 92,124 94,124 96,124 108,124 110,124 118,124 132,124 134,124 138,124 142,124 91,126 93,126 95,126 125,126 127,126 131,126 133,126 135,126 139,126 143,126 90,128 92,128 94,128 96,128 106,128 128,128 130,128 134,128 138,128 142,128 91,130 93,130 95,130 105,130 107,130 113,130 115,130 129,130 131,130 133,130 139,130 143,130 90,132 92,132 94,132 96,132 100,132 104,132 106,132 108,132 110,132 116,132 120,132 136,132 138,132 142,132 91,134 93,134 95,134 99,134 101,134 129,134 133,134 143,134 90,136 92,136 94,136 96,136 100,136 102,136 104,136 140,136 142,136 91,138 93,138 95,138 99,138 101,138 103,138 105,138 111,138 139,138 141,138 143,138 90,140 92,140 94,140 96,140 100,140 102,140 104,140 136,140 138,140 140,140 142,140 91,142 93,142 95,142 97,142 99,142 101,142 103,142 131,142 135,142 137,142 139,142 141,142 143,142 90,144 92,144 94,144 96,144 98,144 100,144 104,144 132,144 134,144 136,144 138,144 140,144 142,144 91,146 93,146 95,146 97,146 99,146 101,146 103,146 119,146 121,146 123,146 125,146 127,146 129,146 131,146 133,146 135,146 137,146 139,146 141,146 143,146 90,148 92,148 94,148 96,148 98,148 104,148 106,148 108,148 110,148 112,148 114,148 116,148 118,148 120,148 122,148 124,148 126,148 128,148 130,148 136,148 138,148 140,148 142,148 91,150 93,150 95,150 97,150 105,150 107,150 109,150 111,150 113,150 115,150 117,150 119,150 121,150 123,150 125,150 127,150 129,150 137,150 139,150 141,150 143,150
NetC9_1: C9.1 J2.25 R1.1 R4.2 | length 26.6
  Top Layer w0.254: v1(104.496,118.826) 104.496,122.911 106.986,125.401 J2.25
  Bottom Layer w0.254: C9.1 98.374,115.062 98.501,114.935 R4.2 100.518,114.62 R1.1 102.418,112.781 104.496,114.859 v1(104.496,118.826)
NetC10_1: C10.1 J2.4 R2.1 R5.2 | length 25.3
  Top Layer w0.15: 101.736,116.762 J2.4
  Top Layer w0.254: 101.736,116.762 108.592,109.906 v1(111.633,109.906)
  Bottom Layer w0.254: C10.1 108.353,106.087 110.624,106.087 110.963,106.426 R5.2 ; R2.1 111.633,105.664 R5.2 ; v1(111.633,109.906) R5.2
NetC11_1: C11.1 J2.23 R8.1 R10.2 | length 25.9
  Top Layer w0.15: 103.911,123.088 106.486,125.663 J2.23
  Top Layer w0.254: v1(103.836,119.799) 103.836,123.013 103.911,123.088
  Bottom Layer w0.254: v1(103.836,119.799) 103.883,119.846 104.057,119.846 104.069,119.857 104.923,119.857 105.273,119.507 110.846,119.507 111.836,118.516 111.836,117.653 111.633,117.45 R10.2 ; C11.1 R10.2 ; R8.1 111.633,114.681 R10.2
NetC12_1: C12.1 J2.6 R9.1 R11.2 | length 46.3
  Top Layer w0.15: v1(100.33,120.269) 102.087,120.269 102.236,120.12 J2.6
  Bottom Layer w0.254: C12.1 96.404,94.143 96.139,93.878 ; R9.1 94.676,92.903 93.701,93.878 93.701,94.082 ; v1(100.33,120.269) 96.19,116.129 93.701,116.129 93.701,94.082 ; R11.2 100.518,94.742 99.654,93.878 96.139,93.878 ; 93.701,94.082 93.904,93.878 96.139,93.878
NetC13_1: C13.1 J2.9 R13.1 R18.2 | length 35.6
  Top Layer w0.15: J2.9 102.986,127.628 103.12,127.762 v1(105.156,127.762)
  Top Layer w0.254: v1(96.404,107.874) v1(96.404,119.01)
  Bottom Layer w0.254: v1(96.404,107.874) C13.1 96.404,104.851 97.369,103.886 R13.1 100.518,106.087 R18.2 ; v1(96.404,119.01) v1(105.156,127.762)
NetC14_1: C14.1 J2.10 R22.1 R23.2@106.045,121.092 | length 10.5
  Top Layer w0.15: J2.10 104.111,118.262 104.826,118.262 105.08,118.516
  Top Layer w0.254: 105.08,118.516 105.236,118.673 v2(105.236,120.312)
  Bottom Layer w0.254: C14.1 103.897,121.008 104.345,120.56 104.935,120.56 105.183,120.312 v2(105.236,120.312) ; v2@105.217,120.293 105.296,120.372 105.296,120.573 105.815,121.092 107.62,121.092 107.686,121.158 R22.1
NetIC2_1: IC2.1 J2.47 | length 55.4
  Top Layer w0.254: J2.47 112.486,128.564 112.979,129.057 122.149,129.057 122.758,128.448 122.758,92.552 IC2.1
NetIC2_4: IC2.4 J2.53 | length 58.9
  Top Layer w0.15: J2.53 113.986,127.61 114.494,128.118 121.285,128.118
  Top Layer w0.175: 126.187,85.115 126.797,85.725 IC2.4
  Top Layer w0.254: 121.285,128.118 121.842,127.561 121.842,84.457 121.869,84.43 125.984,84.43 126.187,84.633 126.187,85.115
NetIC2_6: IC2.6 J1.11 | length 76.7
  Top Layer w0.254: J1.11 116.51,135.951 117.391,135.951 117.552,135.791 119.128,135.791 119.289,135.951 120.391,135.951 121.488,134.854 121.488,133.706 121.92,133.274 123.671,133.274 124.51,134.112 124.51,135.172 125.289,135.951 132.958,135.951 136.881,132.029 136.881,90.754 132.501,86.375 IC2.6
NetIC2_7: IC2.7 J1.10 | length 67
  Top Layer w0.254: IC2.7 131.273,87.025 136.423,92.176 136.423,128.397 v1(131.318,133.502)
  Bottom Layer w0.254: J1.10 119.674,138.455 126.365,138.455 v1(131.318,133.502)
NetIC3_1: IC3.1 J2.49 | length 66.3
  Top Layer w0.254: J2.49 112.986,127.693 113.894,128.6 121.821,128.6 122.296,128.125 122.296,87.762 v1(123.419,86.639) ; v1(134.868,87.675) IC3.1
  Bottom Layer w0.254: v1(123.419,86.639) 133.833,86.639 v1(134.868,87.675)
NetIC3_4: IC3.4 J2.41 | length 65
  Top Layer w0.254: J2.41 110.986,125.171 111.723,124.435 116.399,124.435 118.125,122.709 118.125,121.854 119.736,120.244 v1(119.736,85.242) ; v1(135.51,85.04) 136.195,85.725 IC3.4
  Bottom Layer w0.254: v1(119.736,85.242) 131.432,85.242 131.757,84.917 135.387,84.917 v1(135.51,85.04)
NetIC3_6: IC3.6 J1.14 | length 67
  Top Layer w0.254: J1.14 132.7,140.121 141.097,131.724 141.097,86.858 140.614,86.375 IC3.6
NetIC3_7: IC3.7 J1.13 | length 93.5
  Top Layer w0.175: IC3.7 140.132,87.025 v1(140.132,131.369)
  Top Layer w0.254: v1(105.74,142.951) 105.74,140.721 J1.13
  Bottom Layer w0.254: v1(105.74,142.951) 105.74,144.09 106.056,144.405 127.095,144.405 v1(140.132,131.369)
NetJ1_3: J1.3 R6.2 R7.1 | length 34.6
  Top Layer w0.254: J1.3 122.178,132.283 v1(124.917,132.283)
  Bottom Layer w0.254: R6.2 121.183,112.715 120.487,113.411 120.117,113.411 118.974,114.554 R7.1 119.446,117.206 114.706,121.945 114.706,122.58 115.011,122.885 115.519,122.885 v1(124.917,132.283)
NetJ1_4: J1.4 R17.2 R19.1 | length 38.3
  Top Layer w0.254: v1(116.84,130.988) 117.678,130.15 122.326,130.15 123.273,129.203 123.273,108.244 123.502,108.016 v2@123.502,107.133
  Bottom Layer w0.254: v1(116.84,130.988) J1.4 ; R19.1 R17.2 123.462,104.219 123.462,106.529 123.502,106.569 v2(123.502,107.262)
NetJ1_5: J1.5 R4.1 | length 25.6
  Bottom Layer w0.254: R4.1 102.428,118.857 101.194,120.091 101.194,122.199 101.418,122.199 J1.5
NetJ1_6: J1.6 R10.1 | length 37.4
  Bottom Layer w0.254: J1.6 112.116,134.621 112.116,135.015 113.052,135.951 114.391,135.951 115.189,135.153 115.189,133.858 105.004,123.673 105.004,122.361 105.318,122.047 108.355,122.047 108.483,122.175 111.978,122.175 113.543,120.61 R10.1
NetJ1_7: J1.7 R18.1 | length 36
  Top Layer w0.254: v1(102.428,107.63) 97.877,112.181 97.877,127.798 104.7,134.621 J1.7
  Bottom Layer w0.254: R18.1 v1(102.428,107.63)
NetJ1_8: J1.8 R5.1 | length 36.4
  Bottom Layer w0.254: R5.1 113.543,112.516 115.545,114.518 115.545,120.371 114.021,121.894 114.021,123.708 124.34,134.027 J1.8
NetJ1_9: J1.9 R11.1 | length 78.9
  Top Layer w0.254: v1(102.428,97.064) 97.423,102.069 97.423,139.256 103.734,145.567 117.297,145.567 118.186,144.678 118.186,142.393 119.67,140.909 119.67,138.791 J1.9
  Bottom Layer w0.254: R11.1 v1(102.428,97.064)
NetJ1_16: J1.16 R23.1@106.045,123.002 | length 25.7
  Bottom Layer w0.254: R23.1@106.045,123.002 107.334,123.002 107.565,123.234 110.559,123.234 118.186,130.861 118.186,135.156 116.992,136.35 116.992,138.773 J1.16
NetJ1_17: J1.17 Q4.2 R24.2@133.223,113.345 R25.2 R26.2 | length 56.7
  Top Layer w0.254: J1.17 114.01,138.791 114.01,136.57 115.316,135.264 115.316,133.666 117.918,131.064 123.241,131.064 123.85,130.454 123.85,108.814 125.525,107.139 125.525,106.809 v1(125.552,106.782)
  Bottom Layer w0.254: v1(125.552,106.782) 129.479,106.782 129.987,107.29 R25.2 129.987,109.068 130.087,109.168 Q4.2 130.861,110.048 131.877,111.064 131.877,112.735 132.486,113.345 133.223,113.345 R26.2
NetJ1_18: J1.18 Q3.2 R14.2 R15.2 R16.2 T1.2 | length 92.4
  Bottom Layer w0.254: J1.18 111.005,138.786 109.068,138.786 100.076,129.794 100.076,123.324 97.859,121.107 94.056,121.107 93.243,120.294 93.243,88.595 94.234,87.605 104.851,87.605 105.156,87.909 105.156,89.872 107.13,91.846 107.13,91.89 T1.2 106.846,93.814 Q3.2 107.645,95.824 109.169,97.348 R14.2 R15.2 R16.2
NetJ1_19: J1.19 J2.40 | length 62.4
  Top Layer w0.15: 110.675,113.577 110.675,118.146 110.736,118.207 J2.40
  Top Layer w0.254: v1(98.908,124.054) 98.88,124.026 98.88,118.29 108.052,109.118 116.637,109.118 116.948,109.43 116.948,110.566 116.637,110.877 113.375,110.877 110.675,113.577
  Bottom Layer w0.254: v1(98.908,124.054) 98.908,129.689 J1.19
NetJ1_20: J1.20 J2.42 | length 40.1
  Top Layer w0.254: J2.42 111.236,120.244 115.418,120.244 v1(117.094,121.92)
  Bottom Layer w0.254: v1(117.094,121.92) 126.848,131.674 131.547,131.674 132.359,132.486 132.359,136.102 J1.20
NetJ1_21: J1.21 J2.30 | length 44.7
  Top Layer w0.254: J2.30 108.236,121.419 110.346,123.528 v1(114.986,123.528)
  Bottom Layer w0.254: v1(114.986,123.528) 124.35,132.893 131.699,132.893 131.902,133.096 131.902,134.62 123.901,142.621 J1.21
NetJ1_22: J1.22 J2.34 | length 55.7
  Top Layer w0.15: J2.34 109.236,121.467
  Top Layer w0.254: 109.236,121.467 109.994,122.225 v1(115.291,122.225)
  Bottom Layer w0.254: v1(115.291,122.225) 116.594,120.921 118.069,120.921 128.009,130.861 133.706,130.861 134.518,131.674 134.518,135.941 126.508,143.951 121.17,143.951 J1.22
NetJ2_22: J2.22
NetJ2_24: J2.24 Q1.2 R3.2 | length 21.2
  Top Layer w0.15: 106.736,116.763 J2.24
  Top Layer w0.254: 106.736,116.763 113.237,110.261 v1(116.371,110.261)
  Bottom Layer w0.254: v1(116.371,110.261) 119.124,110.261 Q1.2 119.673,110.261 ; 119.647,109.954 119.673,110.261 ; 119.647,109.954 R3.2 119.573,109.88 119.647,109.954 ; 119.647,109.954 119.673,109.98 119.673,110.261
NetJ2_28: J2.28 Q2.2 R12.2 | length 42.7
  Top Layer w0.15: J2.28 107.736,122.265
  Top Layer w0.254: 107.736,122.265 v1(108.102,122.631)
  Bottom Layer w0.254: v1(108.102,122.631) 112.217,122.631 114.351,120.498 114.351,114.046 112.903,112.598 112.903,107.874 112.751,107.721 112.751,103.815 118.074,98.491 Q2.2 123.229,97.611 123.129,97.511 R12.2
NetJ2_36: J2.36
NetJ2_43: J2.43 R23.2@108.585,89.855 R24.2@106.111,88.646 | length 60.8
  Top Layer w0.15: J2.43 111.486,128.372
  Top Layer w0.254: v1(108.28,94.742) 108.28,107.729 98.331,117.678 98.331,127.185 100,128.854 111.003,128.854 111.486,128.372
  Bottom Layer w0.254: R24.2@106.111,88.646 107.32,89.855 108.585,89.855 108.585,90.78 109.195,91.389 109.195,93.828 v1(108.28,94.742)
NetJ2_48: J2.48 R32.2 R33.2 | length 34.2
  Top Layer w0.15: 112.736,114.503 J2.48
  Top Layer w0.254: 112.736,114.503 114.935,112.304 v1(115.595,112.304)
  Bottom Layer w0.254: v1(115.595,112.304) 115.595,108.102 116.078,107.62 121.234,107.62 122.199,108.585 123.825,108.585 124.054,108.356 124.054,101.448 124.993,100.508 124.993,98.872 R33.2 125.527,98.872 126.736,97.663 R32.2
NetQ1_1: Q1.1 R6.1 | length 3.7
  Bottom Layer w0.254: Q1.1 120.294,112.71 121.209,111.796 121.209,110.805 R6.1
NetQ2_1: Q2.1 R17.1 | length 5.1
  Bottom Layer w0.254: R17.1 121.219,103.657 121.793,103.657 122.326,103.124 122.326,100.594 122.53,100.391 Q2.1
NetQ3_1: Q3.1 R20.1 | length 4.1
  Bottom Layer w0.254: R20.1 104.328,98.247 104.851,97.724 Q3.1
NetQ4_1: Q4.1 R27.1 | length 5.8
  Bottom Layer w0.254: R27.1 129.235,114.239 130.099,113.375 130.099,111.948 Q4.1
NetR20_2: R20.2 R21.1 R28.2 T1.1 T2.3 | length 56.3
  Top Layer w0.254: v1(105.41,99.568) T1.1 106.858,94.158 110.084,94.158 113.36,97.434 v1(113.36,104.267)
  Bottom Layer w0.254: T2.3 101.219,91.846 104.546,91.846 T1.1 ; v1(105.41,99.568) R20.2 106.238,99.797 106.705,99.797 106.705,101.549 106.238,101.549 R21.1 ; v1(113.36,104.267) 115.011,105.918 115.011,112.7 115.214,112.903 115.824,112.903 116.357,112.37 116.357,111.277 116.637,110.998 118.466,110.998 119.075,111.608 120.294,111.608 120.726,111.176 120.726,110.348 121.92,109.154 R28.2
NetR23_1: R23.1@108.585,87.945 T2.1 | length 8
  Top Layer w0.254: v1(103.149,90.83) 105.588,88.392 v1(107.315,88.392)
  Bottom Layer w0.254: T2.1 102.169,90.83 v1(103.149,90.83) ; v1(107.315,88.392) 107.762,87.945 R23.1@108.585,87.945
NetR27_2: R27.2 R30.1 T3.3 | length 15.6
  Top Layer w0.254: v1(126.136,113.284) 126.644,112.776 v1(126.644,103.099)
  Bottom Layer w0.254: R30.1 126.238,103.693 126.639,103.292 T3.3 127.823,103.099 v1(126.644,103.099) ; R27.2 126.136,112.329 v1(126.136,113.284)
NetR32_1: R32.1 T3.1 | length 3.5
  Bottom Layer w0.254: T3.1 128.773,99.461 128.971,99.263 R32.1
pads on no net: J1.27 J1.28 J2.7 J2.29 J2.31 J2.35 J2.37 J2.46 J2.52 J2.54 J2.55 J2.58 J2.59 J2.60 J2.61 J2.64 J2.65 J2.66 J2.67 J2.70 J2.71 J2.72 J2.73 J2.MH1 J2.MH2 J2.MP2 J2.MP3

## Polygon pours and split planes (outlines as drawn)
GND on Bottom Layer "GND_L02_P000" (solid, pour order 0): 158.496,176.784 157.607,177.673 79.375,177.673 79.375,65.278 83.058,61.595 85.09,63.627 155.829,63.627
GND on Top Layer "GND_L01_P001" (solid, pour order 1): 153.416,173.863 152.527,174.752 74.295,174.752 74.295,62.357 77.978,58.674 80.01,60.706 150.749,60.706

## Keep-outs
Keep-Out Layer:
  the board outline again, w0.254

## Silkscreen, mask and mechanical layers (free items; w line width, h text height)
Top Overlay:
  drawing of 250 lines, arcs and shapes, not listed
Bottom Overlay:
  text "Engineered By:" at 140.716,90.932 h1.52
  text "Mr Candido" at 140.716,88.646 h1.52
  text "04/10/2023" at 140.716,86.487 h1.52